# EAGLE board Adafruit PowerBoost 1000C Rev B (EAGLE 7.6.0)
REV: B
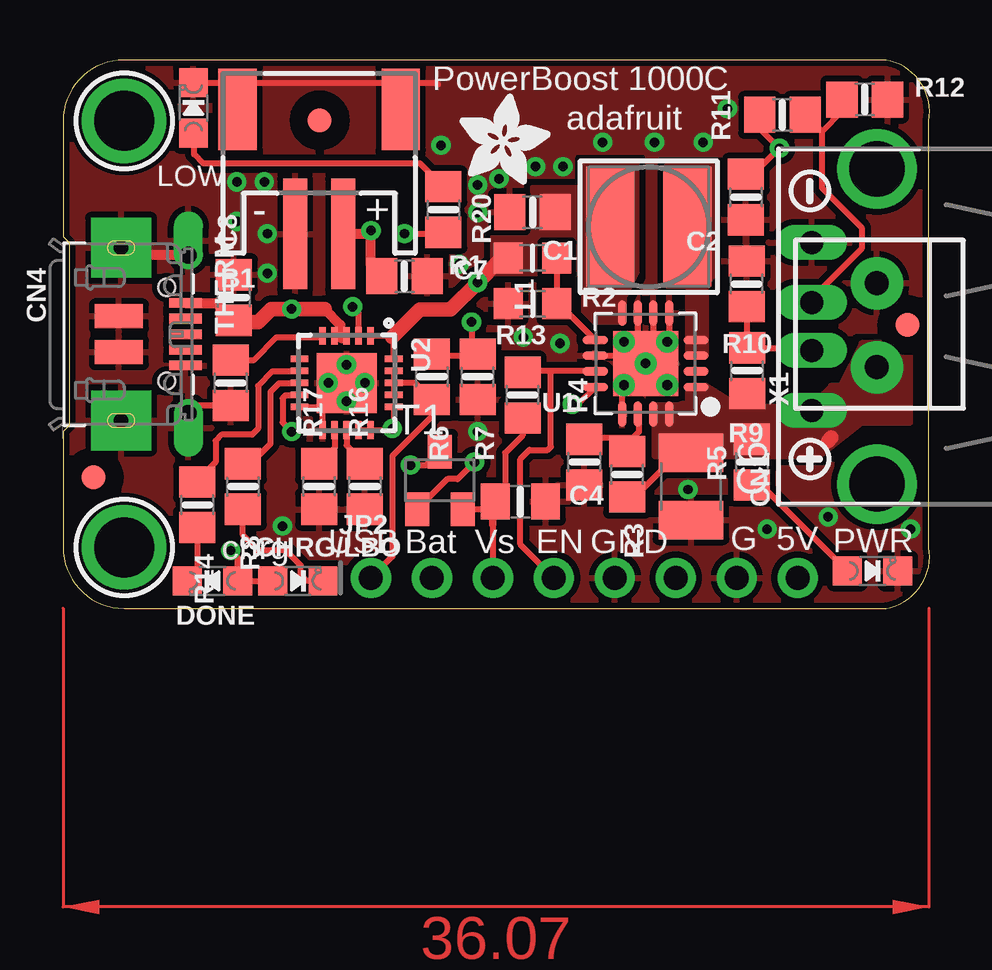
[diagram p0: board, top side]
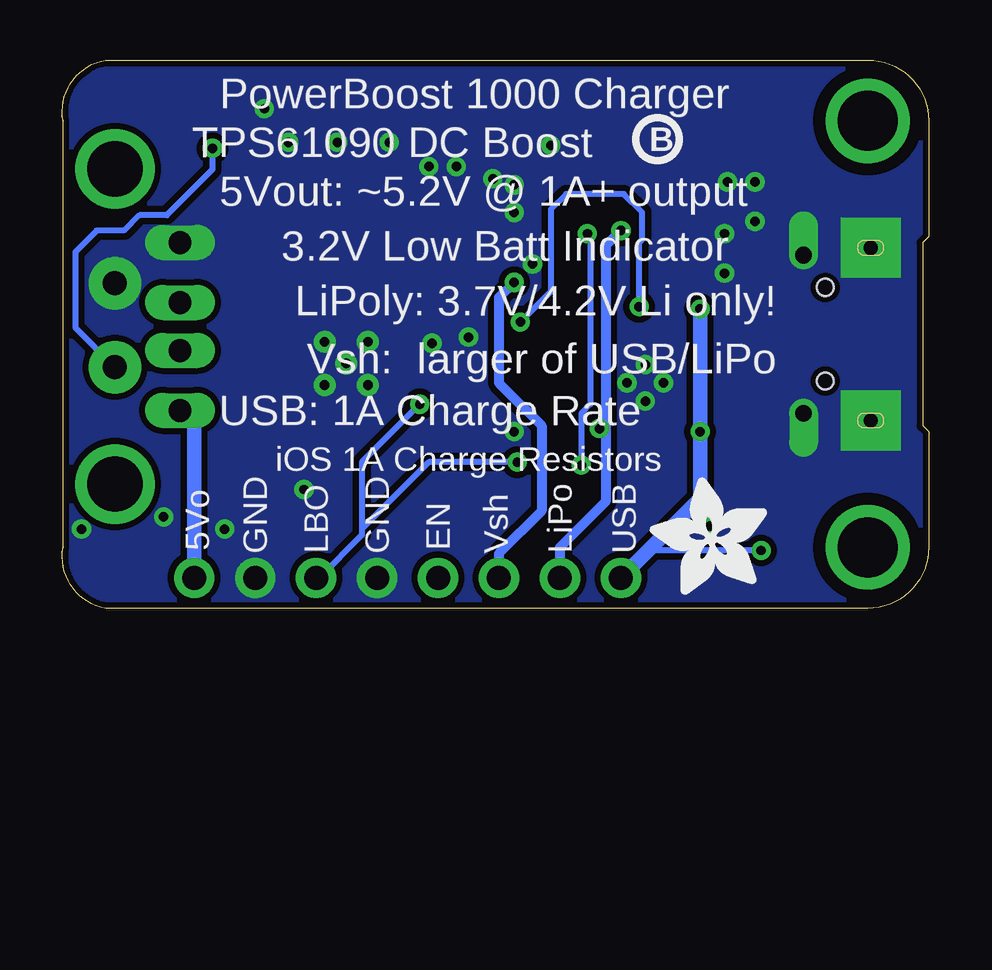
[diagram p1: board, bottom side, seen from below]

Size 36.1 x 22.86 mm. Coordinates in mm from the lower left corner, seen from the top.
Outline: 34.29,22.86 2.54,22.86 arc90 0,20.32 0,15.49 0.25,15.24 0.25,7.62 0,7.37 0,2.54 arc90 2.54,0 34.29,0 arc90 36.07,2.54 36.07,20.32 arc90 34.29,22.86
Copper layers (1*16): Top 0.035mm / dielectric 1.5mm / Bottom 0.035mm
Design rules "adafruit *": minimum track width 8mil, minimum drill 15.5mil, track to track 8mil, track to pad 8mil, pad to pad 8mil, via to via 8mil, smd to smd 8mil, copper to edge 10mil, drill to drill 8mil, minimum pad ring 10mil, minimum via ring 8mil, stop-mask expansion 2mil, vias tented up to drill 20mil, thermal gap 10mil
tRestrict: area 22.9,7.9 to 23.1,8.3; area 24.9,12.1 to 25,12.4; area 24.3,12.1 to 24.4,12.4

## Footprints (pad centres in the part's own frame; a part is rotated, then mirrored left to right if it is on the bottom)
JSTPH2 = smd 1 x 4.6: 1 -1,-3.7; 2 1,-3.7 | smd 1.6 x 3.4: NC1 -3.4,1.5; NC2 3.4,1.5
0805-NO = smd 1.3 x 1.5: 1 -0.95,0; 2 0.95,0
0805_10MGAP = smd 1.2 x 1.5: 1 -1.05,0; 2 1.05,0
C1210 = smd 1.6 x 2.7: 1 -1.4,0; 2 1.4,0
CHIPLED_0805_NOOUTLINE = smd 1.2 x 1.2: A 0,-1.05; C 0,1.05
USB_HOST-PTH = drill 0.95 long: D+ 1,6.52; D- -1,6.52; GND 3.5,6.52; VBUS -3.5,6.52 | drill 2.3 pad 2.9: S1 -6.57,3.81; S2 6.57,3.81
4UCONN_20329 = smd 1 x 2: BASE@1 -0.75,-2; BASE@2 0.75,-2 | smd 0.4 x 1.35: D+ 0,0.775; D- -0.65,0.775; GND 1.3,0.775; ID 0.65,0.775; VBUS -1.3,0.775 | drill 0.7 offset: SPRT@1 -3.3,0.9; SPRT@2 3.3,0.9 | drill 0.6 pad 2.5 square: SPRT@3 -3.6,-1.9; SPRT@4 3.6,-1.9 | hole 0.7: -1.95,0; 1.95,0
FIDUCIAL_1MM = smd 1 x 1: 1 0,0
1X08_ROUND = drill 1 pad 1.676: 1 -8.89,0; 2 -6.35,0; 3 -3.81,0; 4 -1.27,0; 5 1.27,0; 6 3.81,0; 7 6.35,0; 8 8.89,0
INDUCTOR_5X5MM_TDK_VLC5045 = smd 2 x 5: P$1 -1.6,0; P$2 1.6,0
_0805MP = smd 1.2 x 1.3: 1 -1.016,0; 2 1.016,0
SC59-BEC = smd 1 x 1.4: B -0.95,-1.2; C 0,1.2; E 0.95,-1.2
PVQFN-16 = smd 1.05 x 0.35: 1 -2.1,0.975; 2 -2.1,0.325; 3 -2.1,-0.325; 4 -2.1,-0.975; 9 2.1,-0.975; 10 2.1,-0.325; 11 2.1,0.325; 12 2.1,0.975 | smd 0.35 x 1.05: 5 -0.975,-2.1; 6 -0.325,-2.1; 7 0.325,-2.1; 8 0.975,-2.1; 13 0.975,2.1; 14 0.325,2.1; 15 -0.325,2.1; 16 -0.975,2.1 | drill 0.4: P$18 0,0; P$19 -0.9,0.9; P$20 0.9,0.9; P$21 0.9,-0.9; P$22 -0.9,-0.9 | smd 2.7 x 2.7: THERMAL 0,0
QFN20_4MM = smd 0.73 x 0.28: P$1 -1.965,1; P$2 -1.965,0.5; P$3 -1.965,0; P$4 -1.965,-0.5; P$5 -1.965,-1; P$11 1.965,-1; P$12 1.965,-0.5; P$13 1.965,0; P$14 1.965,0.5; P$15 1.965,1 | smd 0.28 x 0.73: P$6 -1,-1.965; P$7 -0.5,-1.965; P$8 0,-1.965; P$9 0.5,-1.965; P$10 1,-1.965; P$16 1,1.965; P$17 0.5,1.965; P$18 0,1.965; P$19 -0.5,1.965; P$20 -1,1.965 | smd 2.5 x 2.5: P$21 0,0
MOUNTINGHOLE_2.5_PLATED = drill 2.5 pad 3.2: P$1 0,0
TERMBLOCK_1X2-3.5MM = drill 1 pad 2.184: 1 1.8,0; 2 -1.7,0

## Placement (x,y rotation side)
B1  JST 2-PH  [JSTPH2]  10.67,19.3 0 top
C1  10uF  [0805-NO]  19.56,16.51 180 top
C2  2.2uF  [0805-NO]  28.45,17.14 270 top
C4  0.1uF  [0805_10MGAP]  19.05,4.45 0 top
C6  100uF  [C1210]  26.16,5.08 270 top
C7  10uF  [0805-NO]  14.22,13.84 0 top
C8  10uF  [0805-NO]  7.11,12.95 90 top
CHRG/LBO  ORANGE  [CHIPLED_0805_NOOUTLINE]  9.78,1.14 270 top
CN1  USBA_FEMALE  [USB_HOST-PTH]  37.72,11.75 90 top
CN4  MicroUSB  [4UCONN_20329]  4.32,11.43 270 top
DONE  GREEN  [CHIPLED_0805_NOOUTLINE]  6.22,1.14 90 top
FID1  FIDUCIAL""  [FIDUCIAL_1MM]  35.18,11.81 0 top
FID2  FIDUCIAL""  [FIDUCIAL_1MM]  10.69,20.34 90 top
FID3  FIDUCIAL""  [FIDUCIAL_1MM]  1.27,5.46 0 top
JP2  [1X08_ROUND]  21.72,1.27 0 top
L1  6.8uH  [INDUCTOR_5X5MM_TDK_VLC5045]  24.4,15.9 0 top
LED1  RED  [CHIPLED_0805_NOOUTLINE]  5.43,20.86 0 top
LED2  BLUE  [CHIPLED_0805_NOOUTLINE]  33.72,1.56 270 top
R1  1.87M  [_0805MP]  19.56,14.61 180 top
R2  340K  [_0805MP]  19.56,12.7 0 top
R3  1.87M  [0805-NO]  23.5,5.59 270 top
R4  200K  [0805-NO]  21.72,6.1 90 top
R5  1K  [0805-NO]  28.7,6.1 270 top
R6  270K  [0805-NO]  15.37,9.65 270 top
R7  100K  [0805-NO]  17.27,9.65 270 top
R8  1K  [0805-NO]  7.49,5.08 270 top
R9  43K  [0805-NO]  28.5,9.91 270 top
R10  49.9K  [0805-NO]  28.48,13.52 90 top
R11  75K 1%  [0805-NO]  29.97,20.57 180 top
R12  49.9K 1%  [0805-NO]  33.4,21.21 0 top
R13  200K  [0805-NO]  19.14,8.89 90 top
R14  1K  [0805-NO]  5.59,4.32 270 top
R16  1.0K  [0805-NO]  12.57,5.08 90 top
R17  100K  [0805-NO]  10.67,5.08 90 top
R20  1K  [0805-NO]  15.84,16.62 270 top
T1  MMUN2133LT1G  [SC59-BEC]  15.7,5.33 0 top
THERM  15K  [0805-NO]  6.99,9.4 90 top
U1  TPS61090RSAR  [PVQFN-16]  24.27,10.21 180 top
U2  MCP73871  [QFN20_4MM]  11.81,9.4 270 top
U$10  MOUNTINGHOLE2.5  [MOUNTINGHOLE_2.5_PLATED]  2.54,20.32 0 top
U$11  MOUNTINGHOLE2.5  [MOUNTINGHOLE_2.5_PLATED]  2.54,2.54 0 top
U$12  [PCBFEAT-REV-040]  11.3,19.56 0 bottom
U$25  [SYMBOL_PLUS]  31.11,6.22 0 top
U$26  [SYMBOL_MINUS]  31.11,17.4 90 top
U$28  [ADAFRUIT_5MM]  6.75,0.58 90 bottom
U$45  [ADAFRUIT_3.5MM]  16.51,17.65 0 top
X1  [TERMBLOCK_1X2-3.5MM]  33.91,11.75 90 top

## Library data of the parts
B1 C1 C2 C4 C7 C8 CHRG/LBO CN1 CN4 DONE JP2 L1 LED1 LED2 R1-R14 R16 R17 R20 THERM U1 U2 U$12 U$25 U$26 U$28 U$45 X1 = microbuilder
C6 = rcl
FID1 FID3 = microbuilder; BOM: EXCLUDE; COMPANY: ADAFRUIT INDUSTRIES; DRAWN: KTOWN; REV: A
FID2 U$10 U$11 = microbuilder; BOM: EXCLUDE
T1 = transistor

## Nets
5.0V: C2.1 C6.1 CN1.VBUS JP2.8 R3.2 R5.1 R9.2 R11.2 U1.1 U1.15 U1.16 X1.2
D+: CN1.D+ R11.1 R12.1
D-: CN1.D- R9.1 R10.1
ENABLE: JP2.4 R13.2 U1.11
GND: B1.1 C1.2 C2.2 C4.2 C6.2 C7.2 C8.2 CN1.GND CN4.BASE@1 CN4.BASE@2 CN4.GND CN4.SPRT@1 CN4.SPRT@2 CN4.SPRT@3 CN4.SPRT@4 JP2.5 JP2.7 LED1.C LED2.C R2.1 R4.1 R7.2 R10.2 R12.2 R16.1 R17.1 THERM.1 U1.5 U1.6 U1.7 U1.10 U1.13 U1.P$18 U1.P$19 U1.P$20 U1.P$21 U1.P$22 U1.THERMAL U2.P$10 U2.P$11 U2.P$21 X1.1
LBO: JP2.6 T1.B U1.12
N$1: L1.P$2 U1.3 U1.4
N$2: LED1.A R20.1
N$3: R1.1 R2.2 U1.9
N$4: LED2.A R5.2
N$5: R3.1 R4.2 U1.14
N$6: R20.2 T1.C
N$7: R6.1 R7.1 U2.P$2
N$8: DONE.C R14.2
N$9: R14.1 U2.P$7
N$10: THERM.2 U2.P$5
N$11: R8.1 U2.P$8
N$12: CHRG/LBO.C R8.2
N$13: R17.2 U2.P$12
N$16: R16.2 U2.P$13
VBAT: C1.1 C4.1 JP2.3 L1.P$1 R1.2 R13.1 T1.E U1.8 U2.P$1 U2.P$20
VBUS: C8.1 CHRG/LBO.A CN4.VBUS DONE.A JP2.1 R6.2 U2.P$3 U2.P$4 U2.P$9 U2.P$17 U2.P$18 U2.P$19
VLIPO: B1.2 C7.1 JP2.2 U2.P$14 U2.P$15 U2.P$16

## Tracks (layer width: path | path; a pad name or v marks a point on that pad's centre or on a via)
5.0V  (via drill 0.39)
  Top 0.254: 32.38,8.38 32.13,8.38 32,8.25 CN1.VBUS | R11.2 29.02,20 v29.84,19.18 28.76,18.09 C2.1 | R3.2 23.82,4.64 25.02,5.84 25.52,5.84 C6.1
  Top 0.61: 31.88,6.99 32,7.11
  Bottom 0.254: v29.84,19.18 29.84,18.29 31.75,16.38 32.89,16.38 33.53,15.75 34.67,15.75 35.56,14.86 35.56,11.7 X1.2
  Bottom 0.61: JP2.8 30.61,7.66 CN1.VBUS
  pour Top (isolate 0.254, no thermals): 24.64,8.51 24.64,6.35 31.5,6.35 33.27,7.75 35.31,7.75 35.31,11.05 33.27,11.05 32.38,9.27 32,9.27 31.11,8.38 28.19,8.38 26.8,9.27 26.04,9.27 26.04,8.51
D+
  Top 0.254: CN1.D+ 31.2,12.91 33.27,14.99 33.27,15.88 31.62,17.53 31.62,19.87 | 31.62,19.87 R11.1 | R12.1 32.45,20.7 31.62,19.87
D-
  Top 0.254: R10.1 28.48,10.88 R9.1 31.09,10.86 CN1.D-
ENABLE
  Top 0.254: U1.11 20.32,9.88 | 20.32,9.88 19.19,9.88 R13.2 | JP2.4 19.05,2.67 19.05,6.22 19.43,6.6 20.19,6.6 20.32,6.73 20.32,9.88
GND  (via drill 0.39)
  Top 0.254: U1.13 23.3,9.07 23.5,9.27 23.41,9.27 U1.P$20 | U1.10 23.61,10.53 23.62,10.54 23.37,10.79 U1.P$21 23.44,11.18 23.88,11.18 23.95,11.25 U1.7 | U1.6 24.6,10.96 24.77,10.79 | U1.5 25.25,11.18 U1.P$22 | THERM.1 5.54,8.45 CN4.SPRT@2 5.22,8.26 5.33,8.26 | LED1.C 15.55,21.91 15.62,21.84 | U2.P$11 10.81,9.16 v11.05,9.4 | U2.P$10 11.57,8.4 v11.81,8.64
  Top 0.406: CN4.SPRT@1 2.85,14.73 | 4.91,7.83 5.33,8.26
  other vias: 27.69,20.83 26.04,4.95 29.34,3.3 31.88,3.81 35.31,3.3 19.18,11.3 17.27,7.37 11.81,10.16 9.14,3.43 20.7,11.05 12.57,9.4 16.51,14.35 19.68,18.41 20.83,18.41 15.75,19.3 17.27,16.51 18.16,17.91 17.27,17.65 8.51,15.62 8.51,13.97 8.38,17.78 7.24,17.78 7.24,16.13 26.67,19.43 24.64,19.43 22.48,19.43
  pour Top (isolate 0.254, rank 2): 0,-0.13 0,22.61 36.07,22.73 36.07,0
  pour Bottom (isolate 0.254, no thermals): 0,22.73 36.07,22.99 36.07,0.25 0,0
LBO  (via drill 0.39)
  Top 0.254: U1.12 21.45,8.51 v21.21,8.51 | v17.14,6.1 16.44,5.39 16,5.39 T1.B
  Bottom 0.254: v21.21,8.51 23.62,6.1 23.62,3.3 | 23.62,3.3 23.62,3.05 25.4,1.27 JP2.6 | v17.14,6.1 20.83,6.1 23.62,3.3
N$1
  pour Top (isolate 0.254, no thermals): 26.04,10.54 26.8,10.54 26.8,13.46 27.05,13.84 27.05,18.41 25.15,18.41 25.15,13.46 26.04,13.46
N$2
  Top 0.254: R20.1 14.87,18.54 5.84,18.54 5.46,18.92 5.46,19.78 LED1.A
N$3
  Top 0.254: R1.1 R2.2 20.94,12.34 21.02,12.34 U1.9
N$4
  Top 0.254: R5.2 29.08,5.15 LED2.A
N$5
  Top 0.254: 23.75,7.11 24,7.37 24,8.05 U1.14 | R4.2 21.72,7.11 23.75,7.11 | R3.1 23.5,6.86 23.75,7.11
N$6  (via drill 0.39)
  Top 0.254: v14.48,5.97 15.13,5.97 T1.C | v14.22,15.62 15.79,15.62 R20.2
  Bottom 0.254: v14.22,15.62 14.1,15.49 14.1,8.51 14.48,8.13 v14.48,5.97
N$7  (via drill 0.39)
  Top 0.254: R6.1 15.43,10.6 15.49,10.54 17.21,10.54 R7.1 | R7.1 17.33,10.54 | U2.P$2 12.31,12.33 v12.06,12.57 | v17.02,11.94 17.02,10.86 R7.1
  Bottom 0.254: v12.06,12.57 12.06,15.24 11.94,15.37 11.94,16.51 12.7,17.27 15.11,17.27 15.75,16.64 15.75,13.21 v17.02,11.94
N$8
  Top 0.254: R14.2 5.59,1.56 DONE.C
N$9
  Top 0.254: R14.1 5.59,5.33 6.35,6.1 6.35,6.99 6.6,7.24 7.87,7.24 8.13,7.49 8.13,9.27 8.74,9.88 9.83,9.88 U2.P$7
N$10
  Top 0.254: THERM.2 7.93,10.35 8.89,11.3 10.82,11.3 U2.P$5
N$11
  Top 0.254: R8.1 7.69,6.22 8,6.22 8.64,6.86 8.64,9.02 9,9.38 9.83,9.38 U2.P$8
N$12
  Top 0.254: CHRG/LBO.C 10.16,1.14 9.91,1.4 9.91,1.78 9.27,2.41 8.13,2.41 7.49,3.05 R8.2
N$13
  Top 0.254: U2.P$12 11.31,6.67 R17.2
N$16
  Top 0.254: U2.P$13 11.81,6.79 R16.2
VBAT  (via drill 0.39)
  Top 0.254: R13.1 19.14,7.21 18.41,6.48 18.41,4.86 C4.1 17.69,4.13 T1.E | 17.91,3.49 JP2.3 | U2.P$1 13.66,11.36 13.72,11.3 13.83,11.19 13.78,11.14 U2.P$20
  Top 0.305: 17.91,3.49 17.91,4.35 C4.1
  Top 0.61: 13.72,11.3 14.86,12.45 16.13,12.45 v17.27,13.59 18.16,14.48 18.54,14.48 R1.2
  Bottom 0.406: v17.27,13.59 17.91,12.95 17.91,9.4 16.13,7.62 16.13,4.06 17.91,2.29 JP2.3
  pour Top (isolate 0.254, no thermals): 23.37,11.94 21.72,11.94 21.72,18.54 23.88,18.54 23.88,13.97 23.37,12.95
  pour Top (no thermals): 19.56,17.53 19.56,15.49 17.91,15.49 17.91,13.97 21.59,13.97 21.72,17.53
VBUS  (via drill 0.39)
  Top 0.254: v9.53,7.37 9.14,7.75 9.14,8.76 9.27,8.88 9.83,8.88 U2.P$9 | CHRG/LBO.A DONE.A 7.27,2.12 v6.99,2.41 | JP2.1 13.72,2.16 13.72,6.35 15.37,8 R6.2 14.68,9.38 13.79,9.38 U2.P$18 | U2.P$4 U2.P$3 11.64,11.36 11.63,11.35 | U2.P$19 U2.P$18 | U2.P$18 U2.P$17
  Top 0.406: CN4.VBUS 6.39,12.73 C8.1 | 10.89,12.48 11.56,11.81 11.56,11.43 | 15.18,8.88 R6.2
  Top 0.61: 10.89,12.48 v9.53,12.48 8.67,12.48 8.13,11.94 7.18,11.94 C8.1 | 11.63,11.35 11.56,11.43
  Bottom 0.254: v6.99,2.41 11.68,2.41
  Bottom 0.61: v9.53,12.48 v9.53,7.37 9.53,4.57 11.68,2.41 JP2.1
VLIPO  (via drill 0.39)
  Top 0.254: U2.P$14 U2.P$15 13.66,7.43 v13.72,7.49 13.78,7.55 U2.P$16
  Top 0.406: B1.2 12.68,15.6 v12.83,15.75 12.83,14.29 C7.1
  Bottom 0.406: v13.72,7.49 13.46,7.49 | JP2.2 15.37,2.54 13.46,4.45 13.46,7.49 | v12.83,15.75 13.46,15.11 13.46,7.49
(copper drawn outside any net)
  shapes: Top area x1

## Text on the board
tPlace: PowerBoost 1000C | adafruit | LOW | - | + | PWR | chrg | USB | Bat | Vs | EN | GND | G | 5V
bPlace: PowerBoost 1000 Charger | TPS61090 DC Boost | 5Vout: ~5.2V @ 1A+ output | 3.2V Low Batt Indicator | LiPoly: 3.7V/4.2V Li only! | Vsh: larger of USB/LiPo | USB: 1A Charge Rate | iOS 1A Charge Resistors | USB | LiPo | Vsh | EN | GND | LBO | GND | 5Vo